# EAGLE board Board_760032v2 (EAGLE 9.6.2)
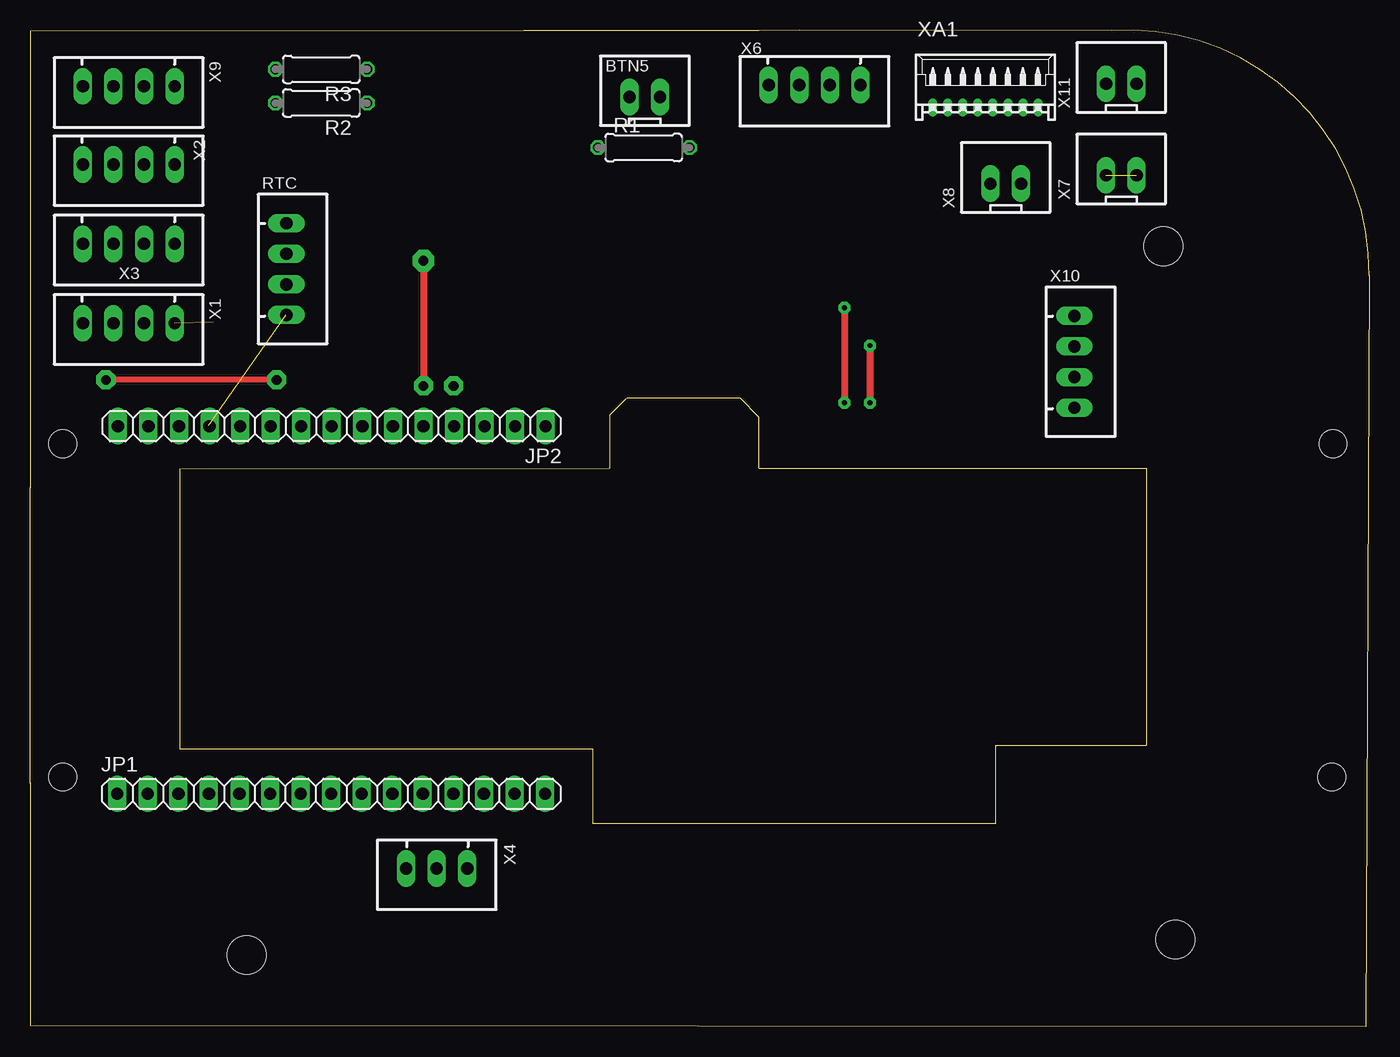
[diagram p0: board, top side]
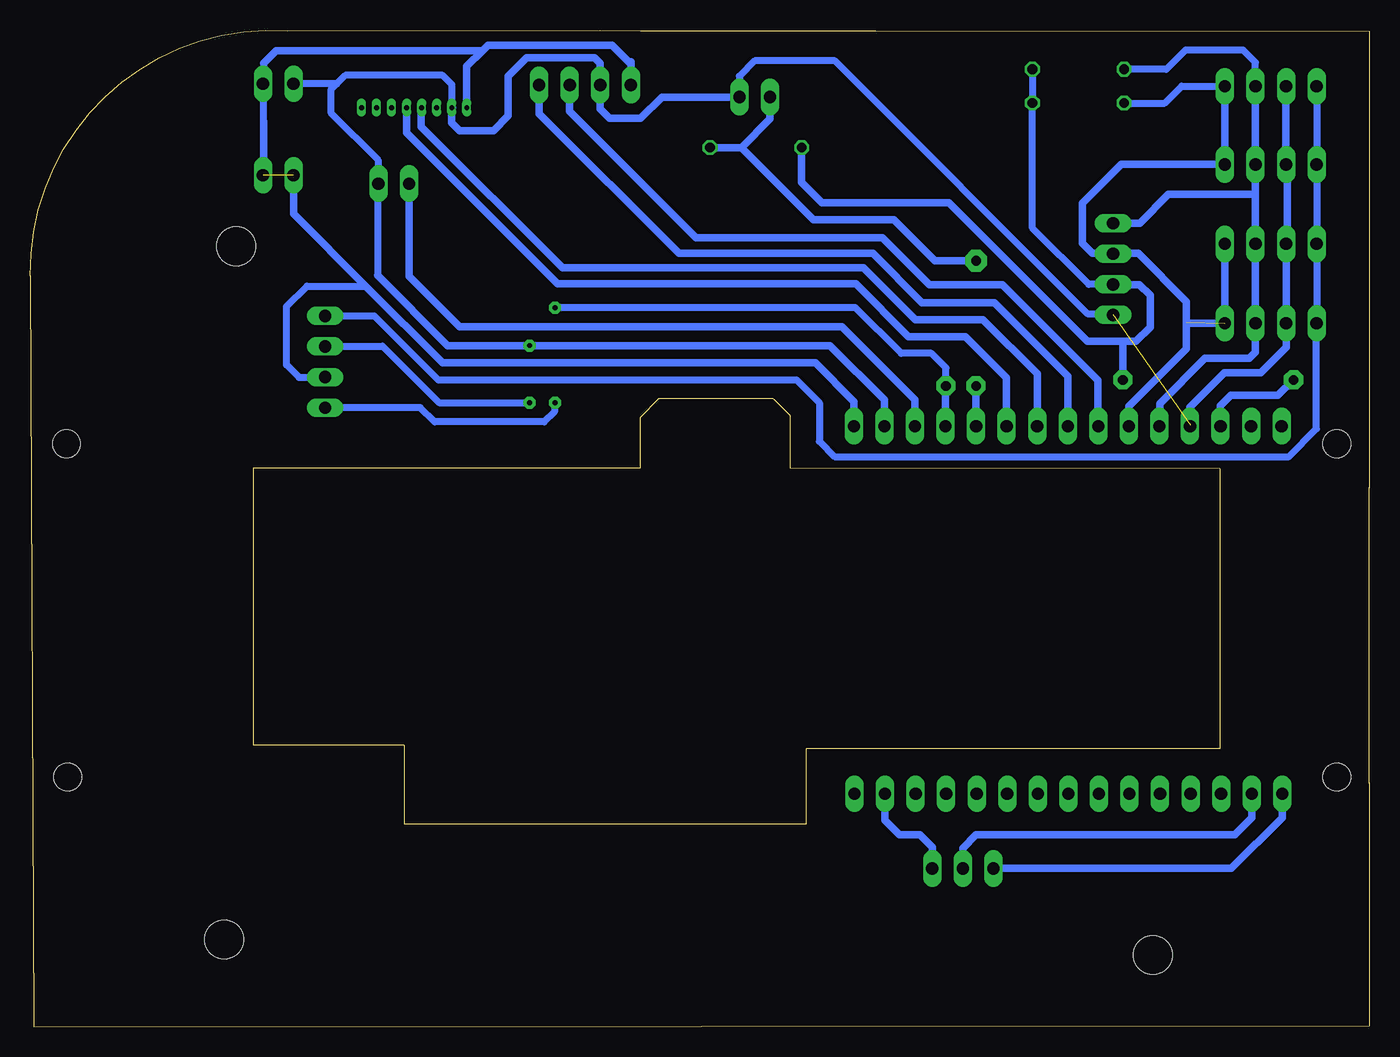
[diagram p1: board, bottom side, seen from below]

Size 111.32 x 82.81 mm. Coordinates in mm from the lower left corner, seen from the top.
Outline: 0,20.29 0,0.09 111.02,0 111.32,62.41 111.22,64.23 arc90 89.9,82.75 63.96,82.81 60.57,82.76 49.57,82.76 41,82.75 0,82.71 0,44.77
Outline: 0,20.23 0,44.82
Outline: 92.79,46.4 92.79,23.4 80.24,23.4 80.24,16.88 46.81,16.88 46.81,23.1 12.56,23.09 12.45,23.09 12.43,46.36 48.15,46.4 48.15,50.8 49.5,52.15 49.6,52.22 59.03,52.22 60.6,50.65 60.6,46.4 92.79,46.4
Copper layers (1*16): Top 0.035mm / dielectric 1.5mm / Bottom 0.035mm
Design rules "default *": minimum track width 0.6mm, minimum drill 0.35mm, track to track 0.4mm, track to pad 0.4mm, pad to pad 0.4mm, via to via 0.4mm, smd to smd 6mil, copper to edge 0.4mm, drill to drill 6mil, minimum pad ring 5mil, minimum via ring 8mil, stop-mask expansion 4mil, vias tented up to drill 0mil, thermal gap 10mil
Holes 2.3 mm at 2.7,48.45 108.3,48.45 108.2,20.75 2.7,20.75
Holes 3.2 mm at 94.2,64.85 95.2,7.25 18,5.95

## Footprints (pad centres in the part's own frame; a part is rotated, then mirrored left to right if it is on the bottom)
JST-XH-02-PACKAGE-LONG-PAD = drill 1.016 long: 1 -1.27,0; 2 1.27,0
1X15 = drill 1.016 long: 1 -17.78,0; 2 -15.24,0; 3 -12.7,0; 4 -10.16,0; 5 -7.62,0; 6 -5.08,0; 7 -2.54,0; 8 0,0; 9 2.54,0; 10 5.08,0; 11 7.62,0; 12 10.16,0; 13 12.7,0; 14 15.24,0; 15 17.78,0
0207/7 = drill 0.813 octagon: 1 -3.81,0; 2 3.81,0
JST-XH-04-PACKAGE-LONG-PAD = drill 1.016 long: 1 -3.81,0; 2 -1.27,0; 3 1.27,0; 4 3.81,0
JST-XH-03-PACKAGE-LONG-PAD = drill 1.016 long: 1 -2.54,0; 2 0,0; 3 2.54,0
MOLEX_53048-0810 = drill 0.4 pad 0.762 long: 1 4.375,0.02; 2 3.125,0.02; 3 1.875,0.02; 4 0.625,0.02; 5 -0.625,0.02; 6 -1.875,0.02; 7 -3.125,0.02; 8 -4.375,0.02

## Placement (x,y rotation side)
BTN5  JST-XH-02-PIN-LONG-PAD  [JST-XH-02-PACKAGE-LONG-PAD]  51.1,77.25 0 top
JP1  [1X15]  25.02,19.36 0 top
JP2  [1X15]  25.08,49.9 180 top
R1  [0207/7]  51,73.05 180 top
R2  [0207/7]  24.2,76.75 180 top
R3  [0207/7]  24.2,79.55 180 top
RTC  JST-XH-04-PIN-LONG-PAD  [JST-XH-04-PACKAGE-LONG-PAD]  21.3,62.95 270 top
X1  JST-XH-04-PIN-LONG-PAD  [JST-XH-04-PACKAGE-LONG-PAD]  8.2,58.45 180 top
X2  JST-XH-04-PIN-LONG-PAD  [JST-XH-04-PACKAGE-LONG-PAD]  8.2,71.65 180 top
X3  JST-XH-04-PIN-LONG-PAD  [JST-XH-04-PACKAGE-LONG-PAD]  8.2,65.05 180 top
X4  JST-XH-03-PIN-LONG-PAD  [JST-XH-03-PACKAGE-LONG-PAD]  33.8,13.15 180 top
X6  JST-XH-04-PIN-LONG-PAD  [JST-XH-04-PACKAGE-LONG-PAD]  65.2,78.25 180 top
X7  btn0  [JST-XH-02-PACKAGE-LONG-PAD]  90.7,70.75 0 top
X8  JST-XH-02-PIN-LONG-PAD  [JST-XH-02-PACKAGE-LONG-PAD]  81.1,70.05 0 top
X9  JST-XH-04-PIN-LONG-PAD  [JST-XH-04-PACKAGE-LONG-PAD]  8.2,78.15 180 top
X10  JST-XH-04-PIN-LONG-PAD  [JST-XH-04-PACKAGE-LONG-PAD]  86.8,55.25 270 top
X11  JST-XH-02-PIN-LONG-PAD  [JST-XH-02-PACKAGE-LONG-PAD]  90.7,78.35 0 top
XA1  53048-0810  [MOLEX_53048-0810]  79.4,76.35 0 top

## Library data of the parts
BTN5 RTC X1-X4 X6-X11 = Rembrandt Electronics - JST XH Connectors v1-0
JP1 JP2 = pinhead
R1-R3 = rcl; SPICEPREFIX: R
XA1 = ConectorPlantower; AVAILABILITY: In Stock; CHECK_PRICES: https://www.snapeda.com/parts/53048-0810/Molex/view-part/?ref=eda; DESCRIPTION: 8 way through board PCB 90deg header | Molex Incorporated 53048-0810; MF: Molex; MP: 53048-0810; PACKAGE: None; PRICE: None; PURCHASE-URL: https://www.snapeda.com/api/url_track_click_mouser/?unipart_id=53851&manufacturer=Molex&part_name=53048-0810&search_term=picoblade 1.25mm header rightangle 8way; SNAPEDA_LINK: https://www.snapeda.com/parts/53048-0810/Molex/view-part/?ref=snap

## Nets
0: JP2.4 X10.4
2: JP1.10
3V3: JP2.13 R1.2 R2.1 R3.1 RTC.3
3V3B: JP1.1 X4.3
4: JP1.9
13: JP1.13
14: JP1.12
15: JP1.11
25: JP1.6
26: JP1.7
27: JP1.8
32: JP1.3
33: JP1.4
34: JP1.5
BTN: BTN5.1 JP2.5 R1.1
GND: BTN5.2 JP2.2 JP2.12 RTC.4 X1.3 X2.3 X3.3 X6.3 X8.2 X9.3 X10.2 X11.1 XA1.7
GND2: JP1.2 X4.2
N$6: XA1.3
N$7: XA1.2
N$8: XA1.1
OUT: X1.4 X2.4 X3.4 X9.4 X10.1
RGB: JP1.14 X4.1
RST: JP2.3 X8.1
RX0: JP2.14
RX1: JP2.9 X6.2
RX2: JP2.7 XA1.5
SCL: JP2.11 R3.2 RTC.1 X1.2 X2.2 X3.2 X9.2
SDA: JP2.10 R2.2 RTC.2 X1.1 X2.1 X3.1 X9.1
SET: XA1.6
TX0: JP2.15
TX1: JP2.8 X6.1
TX2: JP2.6 XA1.4
VBAT: JP1.15
VBUS: JP2.1 X6.4 X7.1 X7.2 X10.3 X11.2 XA1.8

## Tracks (layer width: path | path; a pad name or v marks a point on that pad's centre or on a via)
0  (via drill 0.4 pad 1, 0.8 pad 1.6)
  Top 0.6: v67.7,59.75 v67.7,51.85
  Bottom 0.6: v35.2,53.25 35.2,54.75 36.39,55.95 38.92,55.95 42.72,59.75 v67.7,59.75 | v67.7,51.85 67.7,51.15 68.6,50.25 77.7,50.25 78.9,51.45 X10.4
  Bottom 0.61: JP2.4 35.23,53.22 v35.2,53.25
3V3  (via drill 0.8 pad 1.6)
  Top 0.5: v20.5,53.75 v6.3,53.75
  Bottom 0.6: R3.1 R2.1 28.01,66.36 23.33,61.68 RTC.3
  Bottom 0.61: 12.2,51.1 12.2,50.1 JP2.13 12.38,51.59 11.51,52.45 7.6,52.45 v6.3,53.75 v6.29,53.75 | R1.2 47.19,70.15 45.49,68.45 34.93,68.45 23.43,56.95 20.5,56.95 | 20.5,56.95 19.4,56.95 18.23,58.12 18.23,60.76 19.12,61.65 21.27,61.65 RTC.3 | 20.5,56.95 v20.5,53.75
3V3B
  Bottom 0.61: 7.45,19.35 JP1.1 7.24,17.37 11.46,13.15 X4.3
BTN  (via drill 0.8 pad 1.6, 0.8 pad 1.8)
  Top 0.5: 32.7,63.75 v32.7,63.65
  Top 0.6: v32.7,63.65 v32.7,53.25
  Bottom 0.61: JP2.5 v32.7,53.25 | 52.21,73.05 49.83,75.43 BTN5.1 | v32.7,63.65 36.11,63.65 39.51,67.05 46.21,67.05 52.21,73.05 | R1.1 52.21,73.05
GND  (via drill 0.4 pad 1)  (1 unrouted)
  Top 0.6: v69.8,56.6 v69.8,51.85
  Bottom 0.6: X10.2 86.78,56.54 82.03,56.54 77.34,51.85 v69.8,51.85 | 82.45,62.45 82.45,69.97 X8.2 82.4,70.08 82.4,72.02 86.33,75.95 86.33,77.85 85.83,78.35 | XA1.7 76.27,78.3 77.02,79.05 85.13,79.05 85.83,78.35 | 85.83,78.35 X11.1 | RTC.4 21.38,59.22 23.38,59.22 44.41,80.25 51.1,80.25 52.37,78.98 BTN5.2
  Bottom 0.61: X9.3 6.93,77.99 6.95,77.97 6.95,71.83 6.93,71.81 X2.3 | 14.83,49.99 JP2.12 14.92,51.49 12.05,54.35 9.03,54.35 6.93,56.45 X1.3 X3.3 6.83,65.2 6.83,71.54 X2.3 | 40.45,50.04 JP2.2 40.31,52.09 44.83,56.6 v69.8,56.6 76.61,56.6 82.45,62.45 | 6.7,71.55 X2.3 | 76.33,76.3 XA1.7 | XA1.7 76.26,76.35 76.2,76.35 | XA1.7 76.3,76.34 76.3,75.13 75.64,74.46 72.81,74.46 71.6,75.67 71.6,78.98 70.06,80.52 64.42,80.52 63.93,80.03 X6.3 63.93,76.27 63.14,75.48 60.57,75.48 58.8,77.25 BTN5.2 52.63,77.25 52.83,77.05
GND2
  Bottom 0.61: 9.95,19.35 JP1.2 9.78,17.37 11.2,15.95 32.7,15.95 33.8,14.85 X4.2
OUT
  Bottom 0.6: X10.1 82.71,59.06 77.4,53.75 47.62,53.75 45.72,51.85 45.72,48.64 44.46,47.38 6.69,47.38 4.4,49.67 X1.4 X3.4 X2.4 X9.4
  Bottom 0.61: 4.45,78.3 X9.4 4.6,78.15
RGB
  Bottom 0.61: X4.1 36.34,14.93 37.36,15.96 39.06,15.96 40.26,17.16 JP1.14
RST
  Bottom 0.61: X8.1 79.83,62.35 75.63,58.15 43.84,58.15 37.77,52.09 JP2.3
RX1
  Bottom 0.61: JP2.9 22.57,49.94 22.57,53.73 30.5,61.65 36.57,61.65 40.48,65.55 55.95,65.55 66.47,76.06 X6.2
RX2
  Bottom 0.61: XA1.5 78.8,76.34 78.8,74.79 67.06,63.05 42.05,63.05 37.75,58.75 32.11,58.75 27.61,54.25 JP2.7
SCL
  Bottom 0.6: X9.2 9.47,80.12 10.5,81.15 15.29,81.15 16.89,79.55 R3.2
  Bottom 0.61: X1.2 9.7,58.3 9.7,58.05 9.5,58.4 X1.2 | 9.7,71.05 9.7,71.55 X2.2 | X9.2 9.5,78.14 9.5,71.67 X2.2 | 21.3,66.65 RTC.1 19.1,66.76 16.7,69.16 9.71,69.16 9.5,68.95 | JP2.11 17.43,49.93 17.43,51.78 13.67,55.55 9.97,55.55 9.47,56.05 X1.2 | X2.2 9.5,71.62 9.5,68.95 | 9.5,68.95 9.5,65.07 X3.2 X1.2
SDA  (1 unrouted)
  Bottom 0.6: R2.2 17.01,76.75 15.61,78.15 X9.1 | 12.2,78.05 12,78.25
  Bottom 0.61: 12,78.25 X2.1 | 12.2,78.05 X9.1 | 21.25,64.2 RTC.2 | 12.45,71.8 X2.1 | 21.5,64.2 RTC.2 | 15.2,58.55 15.2,56.35 20,51.55 JP2.10 | RTC.2 21.33,64.25 23.02,64.25 23.87,65.1 23.87,68.41 20.63,71.65 X2.1 | 21.3,64.27 RTC.2 | RTC.2 21.27,64.25 19.22,64.25 15.2,60.23 15.2,58.38 15.11,58.45 X1.1 X3.1
TX1
  Bottom 0.61: 25.2,50.1 JP2.8 25.07,54.04 31.19,60.15 37.17,60.15 41.27,64.25 57.39,64.25 69.01,75.86 X6.1
TX2
  Bottom 0.61: JP2.6 30.15,53.92 33.58,57.35 38.3,57.35 42.7,61.75 67.5,61.75 80.03,74.28 XA1.4
VBUS  (1 unrouted)
  Bottom 0.6: X10.3 86.82,53.96 88.97,53.96 90,54.99 90,59.85 88.32,61.54 83.42,61.54 | 91.9,80.05 91.9,78.42 X11.2 91.9,78.28 91.9,75.25
  Bottom 0.61: 42.95,50 JP2.1 | 42.7,50.35 JP2.1 | JP2.1 42.95,50 | 73.73,81.09 75.03,79.8 XA1.8 75.03,76.67 75.05,76.67 | 73.73,81.09 73.28,81.55 62.95,81.55 61.48,80.07 61.39,80.16 X6.4 | JP2.1 42.85,51.95 46.05,55.15 77.03,55.15 83.42,61.54 89.43,67.55 X7.1 | 73.73,81.09 90.86,81.09 91.9,80.05 | 91.9,75.25 91.9,70.82 X7.2